# Altium PCB 最小板.pcbdoc
Units mil, origin at the board's own origin, x right, y up, seen from the top; angles counter-clockwise.
Board outline 4525.23 x 3718.2 mil, 2 copper layers (Top Layer, Bottom Layer); 104 components, 165 nets, 473 pads, 1 vias.
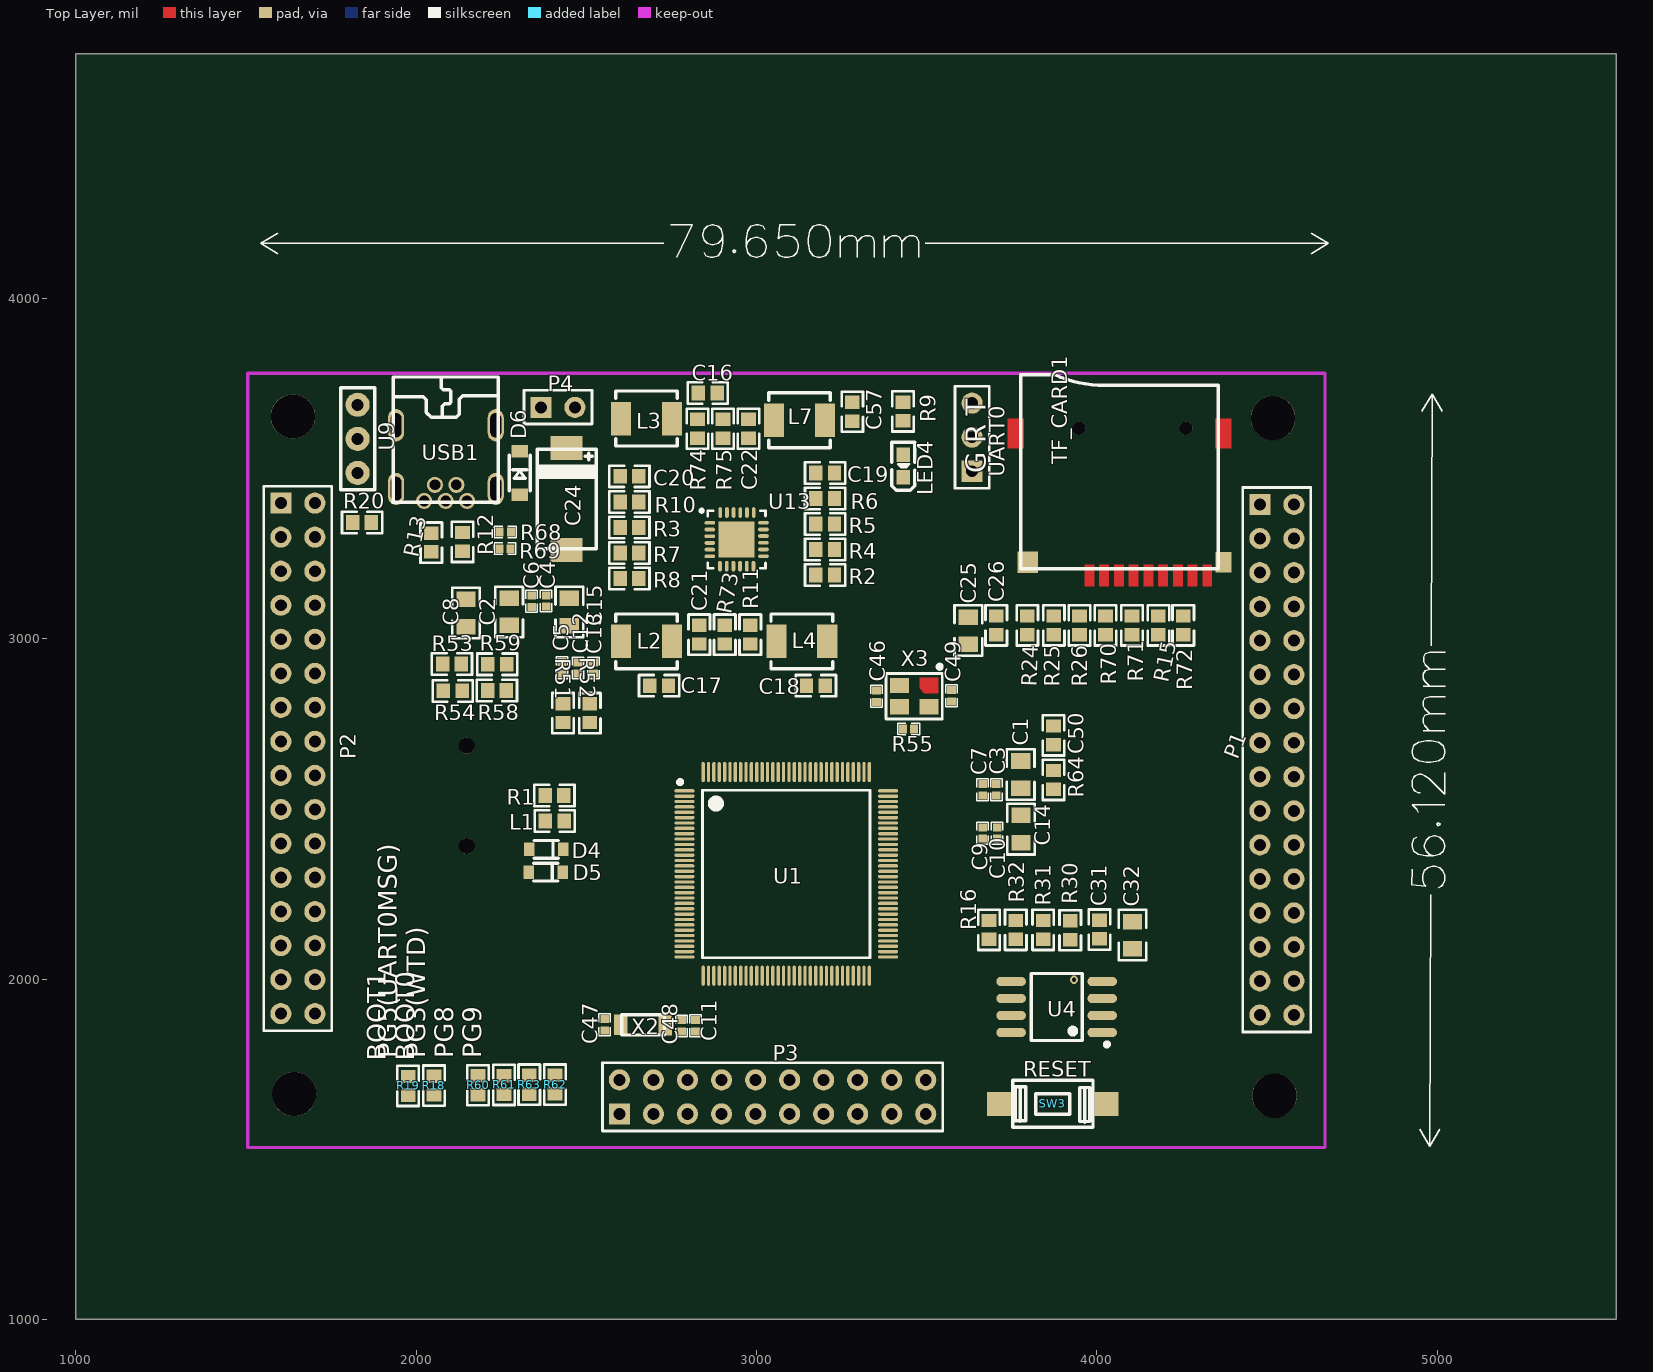
[diagram p0: Top Layer view]
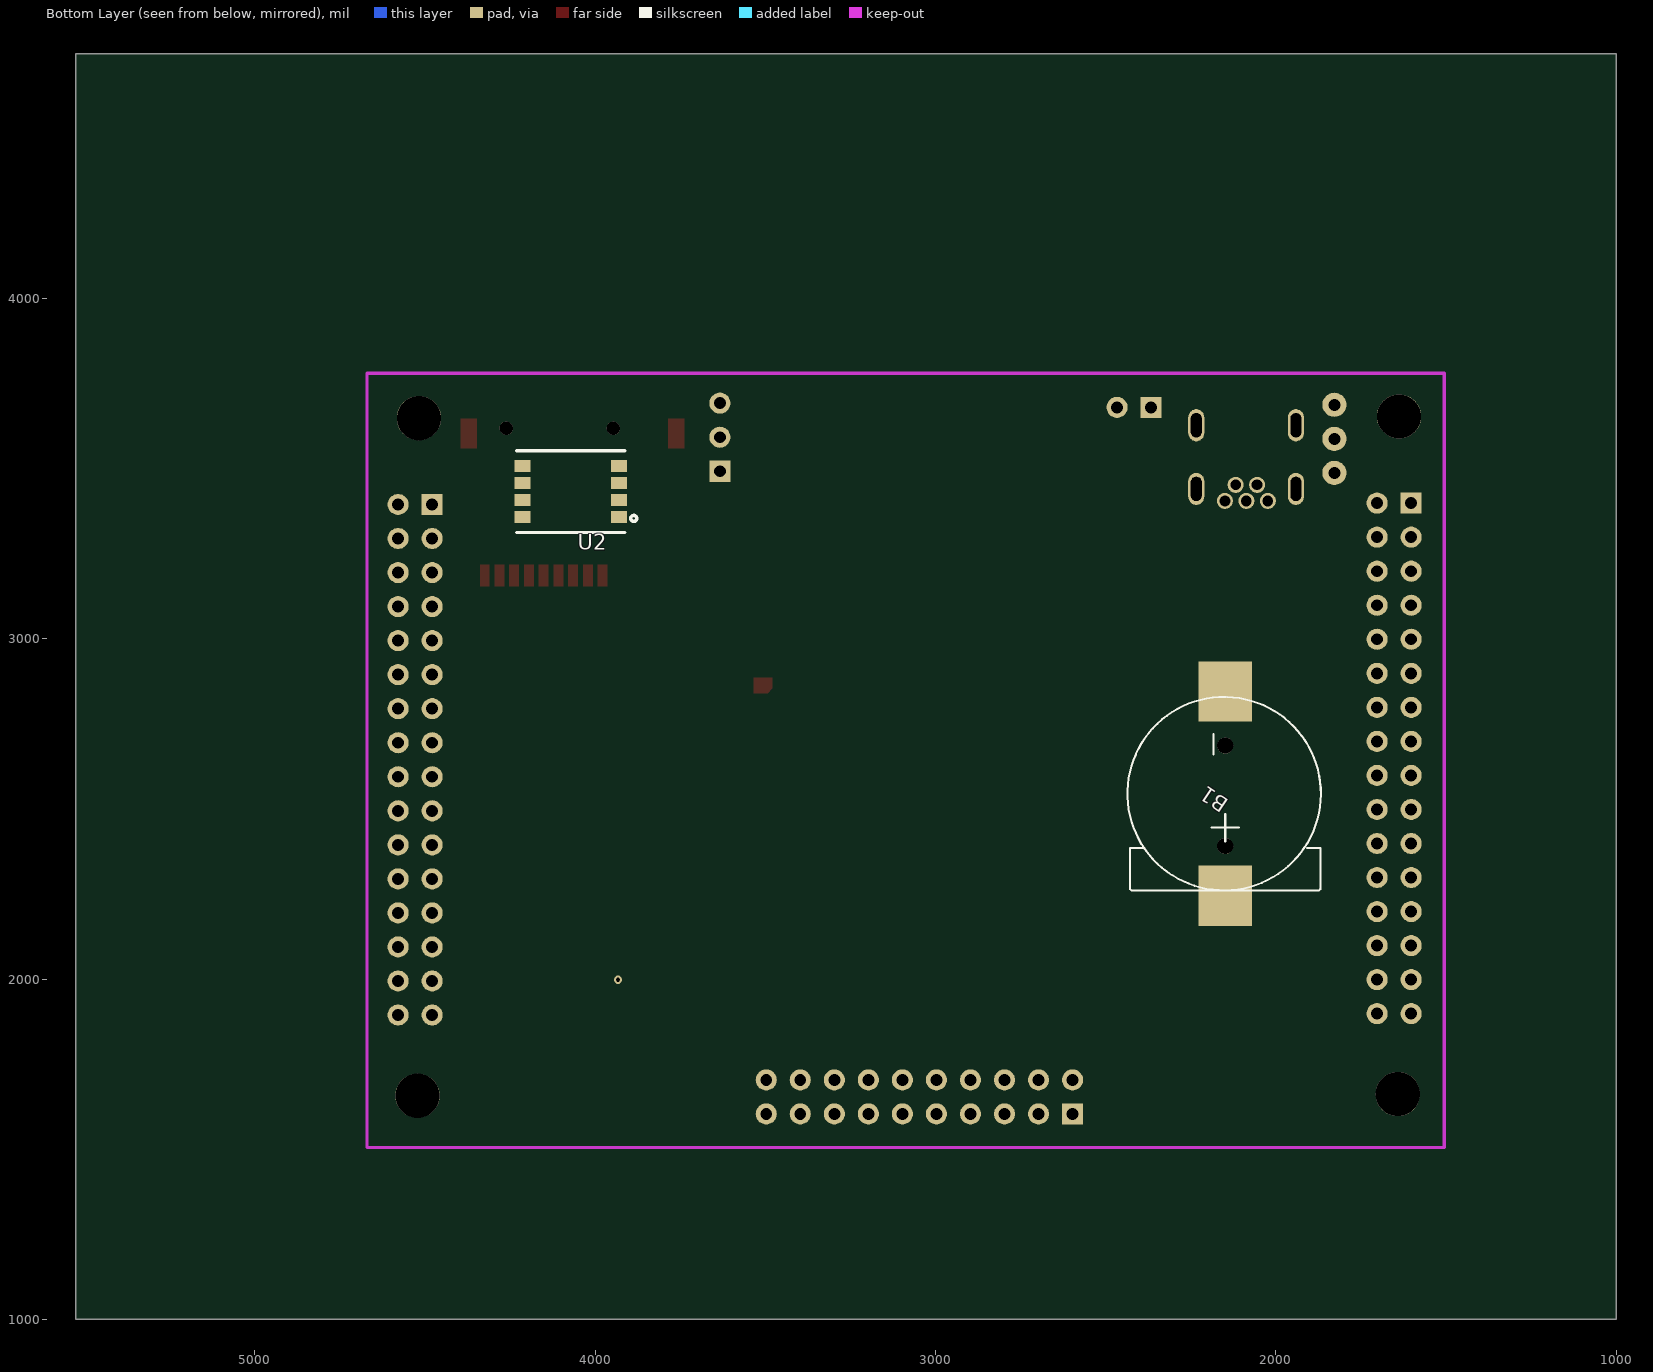
[diagram p1: Bottom Layer view, seen from below]

## Layer stack, top to bottom
Top Layer: signal copper (thickness not stored)
Dielectric: dielectric 12.6, FR-4, Dk 4.8
Bottom Layer: signal copper (thickness not stored)

## Board outline
5525.23,1000 1000,1000 1000,4718.2 5525.23,4718.2

## Components (designator, comment, footprint, x,y, rotation, side; value= is the part's Value field where it differs from the comment)
B1 "CR1220-2" BATTERY-2 2148.37,2544.72 r270 bottom
C1 "10uF" 0805 3775.92,2600.63 r270 top
C2 "10uF" 0805 2273.01,3079.06 r90 top
C3 "100nF" 0402 3704.43,2555.79 r270 top
C4 "100nF" 0402 2381.59,3110.91 r90 top
C5 "100nF" 0402 2428.44,2914.85 r90 top
C6 "100nF" 0402 2339.07,3110.12 r90 top
C7 "100nF" 0402 3664.27,2555.79 r270 top
C8 "10uF" 0805 2146.17,3075.71 r90 top
C9 "100nF" 0402 3664.27,2429.02 r90 top
C10 "100nF" 0402 3706.79,2429.02 r90 top
C11 "100nF" 0402 2820.55,1862.78 r90 top
C12 "100nF" 0402 2474.9,2914.06 r90 top
C13 "100nF" 0402 2520.57,2914.06 r90 top
C14 "10uF" 0805 3776.87,2440.83 r90 top
C15 "10uF" 0805 2450.1,3078.63 r90 top
C16 "10uF" 0603 2856.32,3721.97 r180 top
C17 "10uF" 0603 2713.48,2862.09 r180 top
C18 "22uF" 0603 3174.11,2862.09 r0 top
C19 "10uF" 0603 3201.32,3486.97 r180 top
C20 "10uF" 0603 2626.32,3476.97 r0 top
C21 "10uF" 0603 2831.32,3011.97 r90 top
C22 "10uF" 0603 2976.32,3616.97 r90 top
C24 "470uF" CAP-T7343-D 2441.83,3410.51 r270 top
C25 "10uF" 0805 3622.14,3023.51 r270 top
C26 "100nF" 0603 3704.03,3039.26 r270 top
C31 "100nF" 0603 4007.57,2145.56 r270 top
C32 "10uF" 0805 4104.43,2128.63 r270 top
C46 "15pF" 0402 3352.06,2830.99 r270 top
C47 "15pF" 0402 2553.64,1866.03 r90 top
C48 "15pF" 0402 2779.6,1862.39 r90 top
C49 "15pF" 0402 3572.54,2832.56 r90 top
C50 "1uF" 0603 3872.38,2715.98 r270 top
C57 "10uF" 0603 3281.32,3666.97 r90 top
D4 "1N4148WS T4" SOD-323 2381.99,2380.99 r0 top
D5 "1N4148WS T4" SOD-323 2380.41,2314.06 r0 top
D6 "DSK14" SOD-123 2304.03,3486.89 r270 top
L1 "0Ω" 0603 2406.79,2464.45 r0 top
L2 "1.5uH" L-SMD-4.1X4.6 2676.08,2992.01 r0 top
L3 "1.5uH" L-SMD-4.1X4.6 2676.32,3646.97 r0 top
L4 "1uH" L-SMD-4.1X4.6 3132.77,2992.01 r180 top
L7 "1.5uH" L-SMD-4.1X4.6 3126.32,3641.97 r180 top
LED4 "KT-0603R" LED-0603 3430.8,3507.37 r90 top
P1 "Header-Female-2.54_2x16" HDR-16X2/2.54 4578.44,2594.37 r270 top
P2 "Header-Female-2.54_2x16" HDR-16X2/2.54 1702.07,2598.31 r270 top
P3 "Header-Female-2.54_2x10" HDR-10X2/2.54 3046.95,1653.83 r0 top
P4 "HDR-1X2/2.54" HDR-1X2/2.54 2416.24,3679.81 r0 top
R1 "0" 0603 2406,2539.65 r0 top
R2 "100K" 0603 3201.32,3186.97 r0 top
R3 "510K" 0603 2626.32,3326.97 r180 top
R4 "100K" 0603 3201.32,3261.97 r180 top
R5 "510K" 0603 3201.32,3336.97 r0 top
R6 "110K" 0603 3201.32,3411.97 r180 top
R7 "200K" 0603 2626.32,3251.97 r180 top
R8 "100K" 0603 2626.32,3176.97 r0 top
R9 "1K" 0603 3430.02,3667.6 r270 top
R10 "110K" 0603 2626.32,3401.97 r0 top
R11 "1K" 0603 2981.32,3011.97 r90 top
R12 "27" 0603 2135.93,3284.53 r270 top
R13 "27" 0603 2044.19,3282.56 r270 top
R15 "0" 0603 4180.41,3039.26 r90 top
R16 "0" 0603 3682.77,2144.38 r90 top
R18 "10K" 0603 2052.07,1686.9 r270 top
R19 "10K" 0603 1976.08,1686.11 r270 top
R20 "10K" 0603 1840.65,3341.22 r0 top
R24 "10K" 0603 3795.37,3039.26 r270 top
R25 "10K" 0603 3873.32,3039.25 r270 top
R26 "10K" 0603 3948.91,3039.25 r270 top
R30 "10K" 0603 3921.36,2143.59 r90 top
R31 "10K" 0603 3841.83,2144.38 r90 top
R32 "10K" 0603 3761.51,2144.38 r90 top
R51 "12.1K" 0603 2431.14,2781.38 r270 top
R52 "12.1K" 0603 2509.94,2781.38 r270 top
R53 "4.7" 0603 2104.82,2925.48 r0 top
R54 "4.7" 0603 2107.18,2846.74 r0 top
R55 "1M" 0402 3446.35,2734.84 r180 top
R58 "4.7" 0603 2237.11,2847.52 r0 top
R59 "4.7" 0603 2237.89,2925.08 r0 top
R60 "10K" 0603 2181.56,1687.99 r270 top
R61 "10K" 0603 2257.97,1688.87 r270 top
R62 "10K" 0603 2407.97,1690.05 r270 top
R63 "10K" 0603 2331.99,1689.65 r270 top
R64 "100K" 0603 3872.53,2585.32 r270 top
R68 "20K" 0402 2261.52,3313.27 r180 top
R69 "39K" 0402 2260.73,3264.45 r0 top
R70 "10K" 0603 4025.29,3039.26 r270 top
R71 "10K" 0603 4103.24,3039.26 r270 top
R72 "10K" 0603 4253.64,3039.26 r270 top
R73 "1K" 0603 2906.32,3011.97 r90 top
R74 "1K" 0603 2826.32,3616.97 r90 top
R75 "1K" 0603 2901.32,3616.97 r90 top
SW3 "RESET" KEY-TOUCH-SMD-6.0*3.5*H-(A) 3870.17,1633.35 r0 top
TF_CARD1 "TF_CARD" TF-115_MRS 4324.11,3185.32 r90 top
U1 "NUC980DK61Y" LQFP-128_14X14X04P 3087.1,2308.94 r0 top
U2 "MKDV4GIL-AS" LGA-8_8PIN-L6.10-W8.10-PITCH0.65-TL 4071.35,3432.17 r180 bottom
U4 "W25Q128JVSIQTR" SOIC-8_208MIL 3881.59,1918 r180 top
U9 "3pin插针" 3PIN插针 1827.66,3687.29 r270 top
U13 "EA3059" QFN-24_4X4X05P 2941.35,3291.95 r0 top
UART0 "2.54排针 3pin" HDR-3X1/2.54 3633.17,3592.01 r90 top
USB1 "Mini USB-B 5P-Female-TH_C46398" USB-MINI-2 2087.07,3515.94 r180 top
X2 "32.768KHz" SMD-3215_2P 2666.24,1865.24 r0 top
X3 "12MHz" OSC-YSX-3225_4P 3463.09,2830.99 r180 top
? "" ? 4974.39,2614.06 r0 top
? "" ? 3111.67,4168.45 r0 top

## Footprints (in the part's own frame and the unit in brackets; to place one, negate y for a bottom-side part, rotate by r counter-clockwise, add the part's x,y. Pads: shape width x height; smd on the part's side, far side on the other; paste and mask are expansions set on the pad)
3PIN插针 [mm]
  round 1.8 hole 0.9: 1(0,0) 2(2.54,0) 3(5.08,0)
  silkscreen extent -1.27,-1.27 6.35,1.27
0402 [mil]
  rect 23.62x25.58 smd: 1(-16.7,0) 2(16.7,0)
  silkscreen extent -32,-17 32,17
0603 [mm]
  rect 1x1.1 smd: 1(-0.7,0) 2(0.7,0)
  silkscreen extent -1.5,-0.8 1.5,0.8
0805 [mm]
  rect 1.16x1.45 smd: 1(-1.016,0) 2(1.016,0)
  silkscreen extent -1.9,-1.03 1.87,1.04
BATTERY-2 [mm]
  round 1.2 hole 1.2: 0(-3.581,0) 0(3.912,0)
  rect 4.5x4 smd: 1(7.62,0) 2(-7.62,0)
  silkscreen extent -7.22,-7.3 7.22,7.14
CAP-T7343-D [mm]
  rect 1.8x2.4 smd: 1(-3.81,0) 2(3.81,0)
  silkscreen extent -3.7,-2.2 3.7,2.2
HDR-1X2/2.54 [mil]
  rect 62x62 hole 35: 1(-50,0)
  round 62 hole 35: 2(50,0)
  silkscreen extent -100,-49 100,50
HDR-3X1/2.54 [mil]
  rect 62x62 hole 35: 1(-100,0)
  round 62 hole 35: 2(0,0) 3(100,0)
  silkscreen extent -150,-50 150,50
HDR-10X2/2.54 [mil]
  rect 62x62 hole 35: 1(-450,-50)
  round 62 hole 35: 2(-450,50) 3(-350,-50) 4(-350,50) 5(-250,-50) 6(-250,50) 7(-150,-50) 8(-150,50) 9(-50,-50) 10(-50,50) 11(50,-50) 12(50,50) 13(150,-50) 14(150,50) 15(250,-50) 16(250,50) 17(350,-50) 18(350,50) 19(450,-50) 20(450,50)
  silkscreen extent -500,-100 500,100
HDR-16X2/2.54 [mil]
  rect 62x62 hole 35: 1(-800,-100)
  round 62 hole 35: 2(-800,0) 3(-700,-100) 4(-700,0) 5(-600,-100) 6(-600,0) 7(-500,-100) 8(-500,0) 9(-400,-100) 10(-400,0) 11(-300,-100) 12(-300,0) 13(-200,-100) 14(-200,0) 15(-100,-100) 16(-100,0) 17(0,-100) 18(0,0) 19(100,-100) 20(100,0) 21(200,-100) 22(200,0) 23(300,-100) 24(300,0) 25(400,-100) 26(400,0) 27(500,-100) 28(500,0) 29(600,-100) 30(600,0) 31(700,-100) 32(700,0)
  silkscreen extent -850,-150 750,50
KEY-TOUCH-SMD-6.0*3.5*H-(A) [mm]
  rect 1.8x1.8 smd: 1(-4,0) 2(4,0)
  silkscreen extent -3,-1.75 3,1.75
L-SMD-4.1X4.6 [mm]
  rect 1.5x2.5 smd: 1(-1.9,0) 2(1.9,0)
  silkscreen extent -2.3,-2.05 2.3,2.05
LED-0603 [mil]
  rect 43x39 smd: 1(33.5,0) 2(-33.5,0)
  silkscreen extent -72,-34 70,34
LGA-8_8PIN-L6.10-W8.10-PITCH0.65-TL [mm]
  rect 1.2x0.9 smd: 1(3.6,-1.905) 2(3.6,-0.635) 3(3.6,0.635) 4(3.6,1.905) 5(-3.6,1.905) 6(-3.6,0.635) 7(-3.6,-0.635) 8(-3.6,-1.905)
  silkscreen extent -4.05,-3.05 4.92,3.05
LQFP-128_14X14X04P [mm]
  oval 1.5x0.25 smd: 1(-7.6,6.2) 2(-7.6,5.799) 3(-7.6,5.4) 4(-7.6,5.001) 5(-7.6,4.6) 6(-7.6,4.201) 7(-7.6,3.8) 8(-7.6,3.401) 9(-7.6,3) 10(-7.6,2.601) 11(-7.6,2.2) 12(-7.6,1.801) 13(-7.6,1.4) 14(-7.6,1.001) 15(-7.6,0.599) 16(-7.6,0.201) 17(-7.6,-0.201) 18(-7.6,-0.599) 19(-7.6,-1.001) 20(-7.6,-1.4) 21(-7.6,-1.801) 22(-7.6,-2.2) 23(-7.6,-2.601) 24(-7.6,-3) 25(-7.6,-3.401) 26(-7.6,-3.8) 27(-7.6,-4.201) 28(-7.6,-4.6) 29(-7.6,-5.001) 30(-7.6,-5.4) 31(-7.6,-5.799) 32(-7.6,-6.2) 65(7.6,-6.2) 66(7.6,-5.799) 67(7.6,-5.4) 68(7.6,-5.001) 69(7.6,-4.6) 70(7.6,-4.201) 71(7.6,-3.8) 72(7.6,-3.401) 73(7.6,-3) 74(7.6,-2.601) 75(7.6,-2.2) 76(7.6,-1.801) 77(7.6,-1.4) 78(7.6,-1.001) 79(7.6,-0.599) 80(7.6,-0.201) 81(7.6,0.201) 82(7.6,0.599) 83(7.6,1.001) 84(7.6,1.4) 85(7.6,1.801) 86(7.6,2.2) 87(7.6,2.601) 88(7.6,3) 89(7.6,3.401) 90(7.6,3.8) 91(7.6,4.201) 92(7.6,4.6) 93(7.6,5.001) 94(7.6,5.4) 95(7.6,5.799) 96(7.6,6.2)
  oval 0.25x1.5 smd: 33(-6.2,-7.6) 34(-5.799,-7.6) 35(-5.4,-7.6) 36(-5.001,-7.6) 37(-4.6,-7.6) 38(-4.201,-7.6) 39(-3.8,-7.6) 40(-3.401,-7.6) 41(-3,-7.6) 42(-2.601,-7.6) 43(-2.2,-7.6) 44(-1.801,-7.6) 45(-1.4,-7.6) 46(-1.001,-7.6) 47(-0.599,-7.6) 48(-0.201,-7.6) 49(0.201,-7.6) 50(0.599,-7.6) 51(1.001,-7.6) 52(1.4,-7.6) 53(1.801,-7.6) 54(2.2,-7.6) 55(2.601,-7.6) 56(3,-7.6) 57(3.401,-7.6) 58(3.8,-7.6) 59(4.201,-7.6) 60(4.6,-7.6) 61(5.001,-7.6) 62(5.4,-7.6) 63(5.799,-7.6) 64(6.2,-7.6) 97(6.2,7.6) 98(5.799,7.6) 99(5.4,7.6) 100(5.001,7.6) 101(4.6,7.6) 102(4.201,7.6) 103(3.8,7.6) 104(3.401,7.6) 105(3,7.6) 106(2.601,7.6) 107(2.2,7.6) 108(1.801,7.6) 109(1.4,7.6) 110(1.001,7.6) 111(0.599,7.6) 112(0.201,7.6) 113(-0.201,7.6) 114(-0.599,7.6) 115(-1.001,7.6) 116(-1.4,7.6) 117(-1.801,7.6) 118(-2.2,7.6) 119(-2.601,7.6) 120(-3,7.6) 121(-3.401,7.6) 122(-3.8,7.6) 123(-4.201,7.6) 124(-4.6,7.6) 125(-5.001,7.6) 126(-5.4,7.6) 127(-5.799,7.6) 128(-6.2,7.6)
  silkscreen extent -8.07,-6.25 6.25,7
OSC-YSX-3225_4P [mm]
  round 0 smd: 1(-1.1,-0.8)
  rect 1.4x1.15 smd: 2(1.1,-0.8) 3(1.1,0.8) 4(-1.1,0.8)
  Top Layer region: -1.8,-0.225 -0.762,-0.225 -0.4,-0.604 -0.4,-1.375 -1.8,-1.375
  silkscreen extent -2.1,-2.35 2.1,1.7
QFN-24_4X4X05P [mm]
  oval 0.796x0.28 smd: 1(-2,1.232) 2(-2,0.732) 3(-2,0.231) 4(-2,-0.267) 5(-2,-0.767) 6(-2,-1.267) 13(2,-1.257) 14(2,-0.757) 15(2,-0.257) 16(2,0.241) 17(2,0.742) 18(2,1.242)
  oval 0.28x0.796 smd: 7(-1.245,-2) 8(-0.744,-2) 9(-0.244,-2) 10(0.254,-2) 11(0.754,-2) 12(1.255,-2) 19(1.27,2) 20(0.77,2) 21(0.269,2) 22(-0.229,2) 23(-0.729,2) 24(-1.229,2)
  rect 2.68x2.68 smd: 25(0,-0.013)
  silkscreen extent -2.84,-2.16 2.15,2.35
SMD-3215_2P [mil]
  rect 39.37x60 smd: 1(-64.88,0.96) 2(64.87,-0.95)
  silkscreen extent -63,-30 63,29
SOD-123 [mil]
  rect 35.8x48 smd: 1(64,0) 2(-64,0)
  silkscreen extent -53,-31 53,31
SOD-323 [mil]
  rect 31.5x39.37 smd: 1(-50,0) 2(50,0)
  silkscreen extent -35,-26 35,26
SOIC-8_208MIL [mm]
  oval 2.2x0.7 smd: 1(-3.4,1.905) 2(-3.4,0.635) 3(-3.4,-0.635) 4(-3.4,-1.905) 5(3.4,-1.905) 6(3.4,-0.635) 7(3.4,0.635) 8(3.4,1.905)
  silkscreen extent -3.9,-2.5 1.9,2.95
TF-115_MRS [mm]
  round 0 smd: 1(0,8.8) 2(0,7.7) 3(0,6.6) 4(0,5.5) 5(0,4.4) 6(0,3.3) 7(0,2.2) 8(0,1.1) 9(0,0) 11(10.6,-1.2) 12(10.6,14.3)
  rect 1.5x1.2 smd: 10(1,-1.2)
  rect 1.6x1.5 smd: 13(1,13.4)
  round 1 hole 1 unplated: ""(11,1.6) ""(11,9.6)
  Top Layer region: -0.8,-0.351 -0.8,0.351 0.8,0.351 0.8,-0.351
  Top Layer region: -0.8,0.749 -0.8,1.45 0.8,1.45 0.8,0.749
  Top Layer region: -0.8,1.849 -0.8,2.55 0.8,2.55 0.8,1.849
  Top Layer region: -0.8,2.949 -0.8,3.65 0.8,3.65 0.8,2.949
  Top Layer region: -0.8,4.049 -0.8,4.75 0.8,4.75 0.8,4.049
  Top Layer region: -0.8,5.151 -0.8,5.85 0.8,5.85 0.8,5.151
  Top Layer region: -0.8,6.251 -0.8,6.949 0.8,6.949 0.8,6.251
  Top Layer region: -0.8,7.351 -0.8,8.049 0.8,8.049 0.8,7.351
  Top Layer region: -0.8,8.451 -0.8,9.149 0.8,9.149 0.8,8.451
  Top Layer region: 9.499,13.701 9.499,14.9 11.699,14.9 11.699,13.701
  Top Layer region: 9.499,-1.801 9.499,-0.6 11.699,-0.6 11.699,-1.801
  silkscreen extent 0.5,-0.82 15,13.92
USB-MINI-2 [mm]
  oval 1.2x2.4 hole 0.8 slot 1.8 at 90 deg: 0(-3.72,-2.826) 0(-3.72,1.924) 0(3.72,-2.826) 0(3.72,1.924)
  round 1.2 hole 0.8: 1(-1.58,2.826) 2(-0.78,1.622) 3(0.02,2.826) 4(0.82,1.622) 5(1.62,2.826)
  silkscreen extent -3.89,-6.42 3.96,2.93
? [mil]
  silkscreen extent -49,-1105 49,1105

## Free pads (board coordinates)
  round 130 hole 130 unplated: ""(1637.5,3653.04) ""(1641.64,1662.05) ""(4517.5,3648.04) ""(4521.64,1657.05)

## Via types
v1: diameter 24, hole 12, Top Layer to Bottom Layer, 1 vias

## Nets (pads, with @x,y where several pads share a name; then routed paths per layer and width w, separated by ;. In a path a pad name is that pad's centre, name@x,y a point inside that pad or via, vN(x,y) a via of type N, cw(c..) or ccw(c..) an arc to the next point about the centre after c; other vN are vias at no path point)
1.2V: C8.2 C9.2 C10.2 C11.2 C12.2 C13.2 C18.2 L4.1 R2.2 U1.10 U1.13 U1.43 U1.82 U1.94 U1.118 U1.123
1.8V: C14.2 C15.2 C17.2 L2.1 R7.2 U1.11 U1.12 U1.83 U1.84
3.3V: C1.2 C2.2 C3.2 C4.2 C5.2 C6.2 C7.2 C25.2 C26.2 C31.1 C32.1 C57.2 D5.1 L1.1 L7.1 P1.3 R5.2 R20.2 R24.2 R25.2 R26.2 R30.2 R31.2 R32.2 R64.2 R70.2 R71.2 R72.2 TF_CARD1.4 U1.9 U1.20 U1.60 U1.85 U1.102 U1.121 U1.126 U2.8 U4.8
+5V: C19.2 C20.2 C21.2 C22.2 C24.1 D6.2 P1.1 P2.2 R11.1 R73.1 R74.2 R75.2 U13.3 U13.8 U13.11 U13.20 U13.23
ADC_3.3V: L1.2 U1.33
B1_1: B1.1 D4.1
C32_2: C32.2
FB1: R2.1 R4.2 U13.14
FB2: R7.1 R8.2 U13.5
FB3: R3.1 R10.2 U13.2
FB4: R5.1 R6.2 U13.17
GND: B1.2 C1.1 C2.1 C3.1 C4.1 C5.1 C6.1 C7.1 C8.1 C9.1 C10.1 C11.1 C12.1 C13.1 C14.1 C15.1 C16.1 C17.1 C18.1 C19.1 C20.1 C21.1 C22.1 C24.2 C25.1 C26.1 C31.2 C46.1 C47.1 C48.1 C49.1 C50.1 C57.1 LED4.2 P1.2 P1.4 P1.32 P2.1 P2.31 P3.19 R1.1 R4.1 R6.1 R8.1 R10.1 R51.1 R52.1 R69.1 SW3.1 TF_CARD1.6 TF_CARD1.10 TF_CARD1.11 TF_CARD1.12 TF_CARD1.13 U1.64 U1.95 U1.128 U2.4 U4.4 U9.1 U13.1 U13.4 U13.6 U13.13 U13.18 U13.25 UART0.1 USB1.0 USB1.5 X3.2 X3.4
GND1: R1.2 U1.32
LX1: L4.2 U13.12
LX2: L2.2 U13.7
LX3: L3.2 U13.24
LX4: L7.2 U13.19
OTH3.3V: C16.2 L3.1 P1.31 P3.20 R3.2 R9.1
P3_18: P3.18
PA0: P2.7 U1.2
PA1: P2.10 U1.3
PA2: P2.9 U1.4
PA3: P2.12 U1.5
PA4: P2.11 U1.6
PA5: P2.14 U1.7
PA6: P2.13 U1.8
PA7: P2.16 U1.14
PA8: P2.15 U1.15
PA9: P2.18 U1.16
PA10: P2.17 U1.17
PA11: P2.20 U1.18
PA12: P2.19 U1.19
PB0: P2.30 U1.29
PB1: P1.26 U1.36
PB2: P1.24 U1.38
PB3: P1.23 U1.37
PB4: P2.32 P3.2 U1.31
PB5: P1.25 U1.35
PB6: P2.29 P3.1 U1.30
PB7: P1.28 U1.34
PB8: P1.27 U1.42
PB13: P1.10 U1.93
PC0: P1.30 U1.44
PC1: P3.3 U1.45
PC2: P3.4 U1.46
PC3: P3.5 U1.47
PC4: P3.6 U1.48
PC5: P3.7 U1.49
PC6: P3.8 U1.50
PC7: P3.9 U1.51
PC8: P3.10 U1.52
PC9: P3.11 U1.53
PC10: P3.12 U1.54
PC11: P3.13 U1.55
PC12: P3.14 U1.56
PC13: P3.15 U1.57
PC14: P3.16 U1.58
PC15: P3.17 U1.59
PD8: P1.21 U1.68
PD9: P1.22 U1.69
PD10: P1.19 U1.70
PD11: P1.20 U1.71
PD12: P1.17 U1.72
PD13: P1.18 U1.73
PD14: P1.15 U1.74
PD15: P1.16 U1.75
PE10: P2.6 U1.115
PE11: P2.5 R68.1 R69.2 U1.116
PE12: P2.8 U1.117
PF7: P1.8 U1.96
PF8: P1.7 U1.97
PF9: P1.6 U1.98
PF10: P1.5 U1.99
PG0: P2.27 R18.1 U1.28
PG1: P2.28 R19.1 U1.27
PG3: P2.25 R61.1 U1.26
PG5: P2.26 R60.1 U1.25
PG6: P2.23 U1.24
PG7: P2.24 U1.23
PG8: P2.21 R62.1 U1.22
PG9: P2.22 R63.1 U1.21
PG11: P1.13 U1.76
PG12: P1.14 U1.77
PG13: P1.11 U1.78
PG14: P1.12 U1.79
PG15: P1.9 U1.80
R9_2: LED4.1 R9.2
R60_2: R60.2
R61_2: R61.2
R62_2: R62.2
R63_2: R63.2
RESET: C50.2 P1.29 R64.1 SW3.2 U1.81
RMIIOREFCLK: U1.109
RMIOCRSDV: U1.106
RMIOMDC: U1.114
RMIOMDIO: U1.113
RMIORXD0: U1.108
RMIORXD1: U1.107
RMIORXER: U1.105
RMIOTXD0: U1.112
RMIOTXD1: U1.111
RMIOTXEN: U1.110
RTCVD: D4.2 D5.2 U1.39
RXD0: U1.100 UART0.2
S$19: 
S$28: 
S$30: 
S$42: 
S$44: 
S$47: 
S$48: 
S$49: 
S$50: 
S$53: 
S$54: 
S$55: 
S$57: 
S$61: 
S$67: 
S$69: 
S$2331: 
SD_CD: R24.1 TF_CARD1.9 U1.92
SD_CLK: R15.1 U1.87
SD_CLK-P: R15.2 TF_CARD1.5 U2.3
SD_CMD: R72.1 TF_CARD1.3 U1.86 U2.5
SD_D0: R71.1 TF_CARD1.7 U1.88 U2.6
SD_D1: R70.1 TF_CARD1.8 U1.89 U2.7
SD_D2: R26.1 TF_CARD1.1 U1.90 U2.1
SD_D3: R25.1 TF_CARD1.2 U1.91 U2.2
SPI_CLK: R16.2 U1.62
SPI_CS: R30.1 U1.61 U4.1
SPI_D3: R31.1 U1.67 U4.7
SPI_DI: U1.65 U4.2
SPI_DO: U1.63 U4.5
SPI_WP: R32.1 U1.66 U4.3
SW2_3: R18.2
SW2_4: R19.2
TXD0: U1.101 UART0.3
U4_6: R16.1 U4.6
U9_3: R20.1 U9.3
U13_9: R73.2 U13.9
U13_10: R11.2 U13.10
U13_15: U13.15
U13_16: U13.16
U13_21: R75.1 U13.21
U13_22: R74.1 U13.22
USB0_DM: R12.2 R53.2 U1.124
USB0_DP: R13.2 R54.2 U1.125
USB0_ID: U1.1 U9.2
USB0_REXT: R51.2 U1.127
USB1_1: D6.1 R68.2 USB1.1
USB1_2: R12.1 USB1.2
USB1_3: R13.1 USB1.3
USB1_4: USB1.4
USB1_DM: R58.2 U1.119
USB1_DM_E: P2.3 R58.1
USB1_DP: R59.2 U1.120
USB1_DP_E: P2.4 R59.1
USB1_REXT: R52.2 U1.122
USB2_2: R53.1
USB2_3: R54.1
X2_IN: C47.2 U1.40 X2.1
X2_OUT: C48.2 U1.41 X2.2
X_IN: C49.2 R55.1 U1.103 X3.1
X_OUT: C46.2 R55.2 U1.104 X3.3
pads on no net: B1.0 P4.1 P4.2 TF_CARD1.
copper on no net:
  other v1: 3932.38,1997.92

## Silkscreen, mask and mechanical layers (free items; w line width, h text height)
Top Overlay:
  text "G R T" at 3672.93,3486.11 h59.05 r90
  text "PG5(UART0MSG) / PG3(WTD) / PG8 / PG9" at 2191.37,1767.83 h55.12 r90
  text "BOOT1 / BOOT0" at 1993.47,1759.64 h55.12 r90